# Altium PCB ECUCheater_New.PcbDoc
Units mm, origin at the board's own origin, x right, y up, seen from the top; angles counter-clockwise.
Board outline 51.5 x 32 mm, 2 copper layers (Top Layer, Bottom Layer); 60 components, 42 nets, 205 pads, 68 vias.
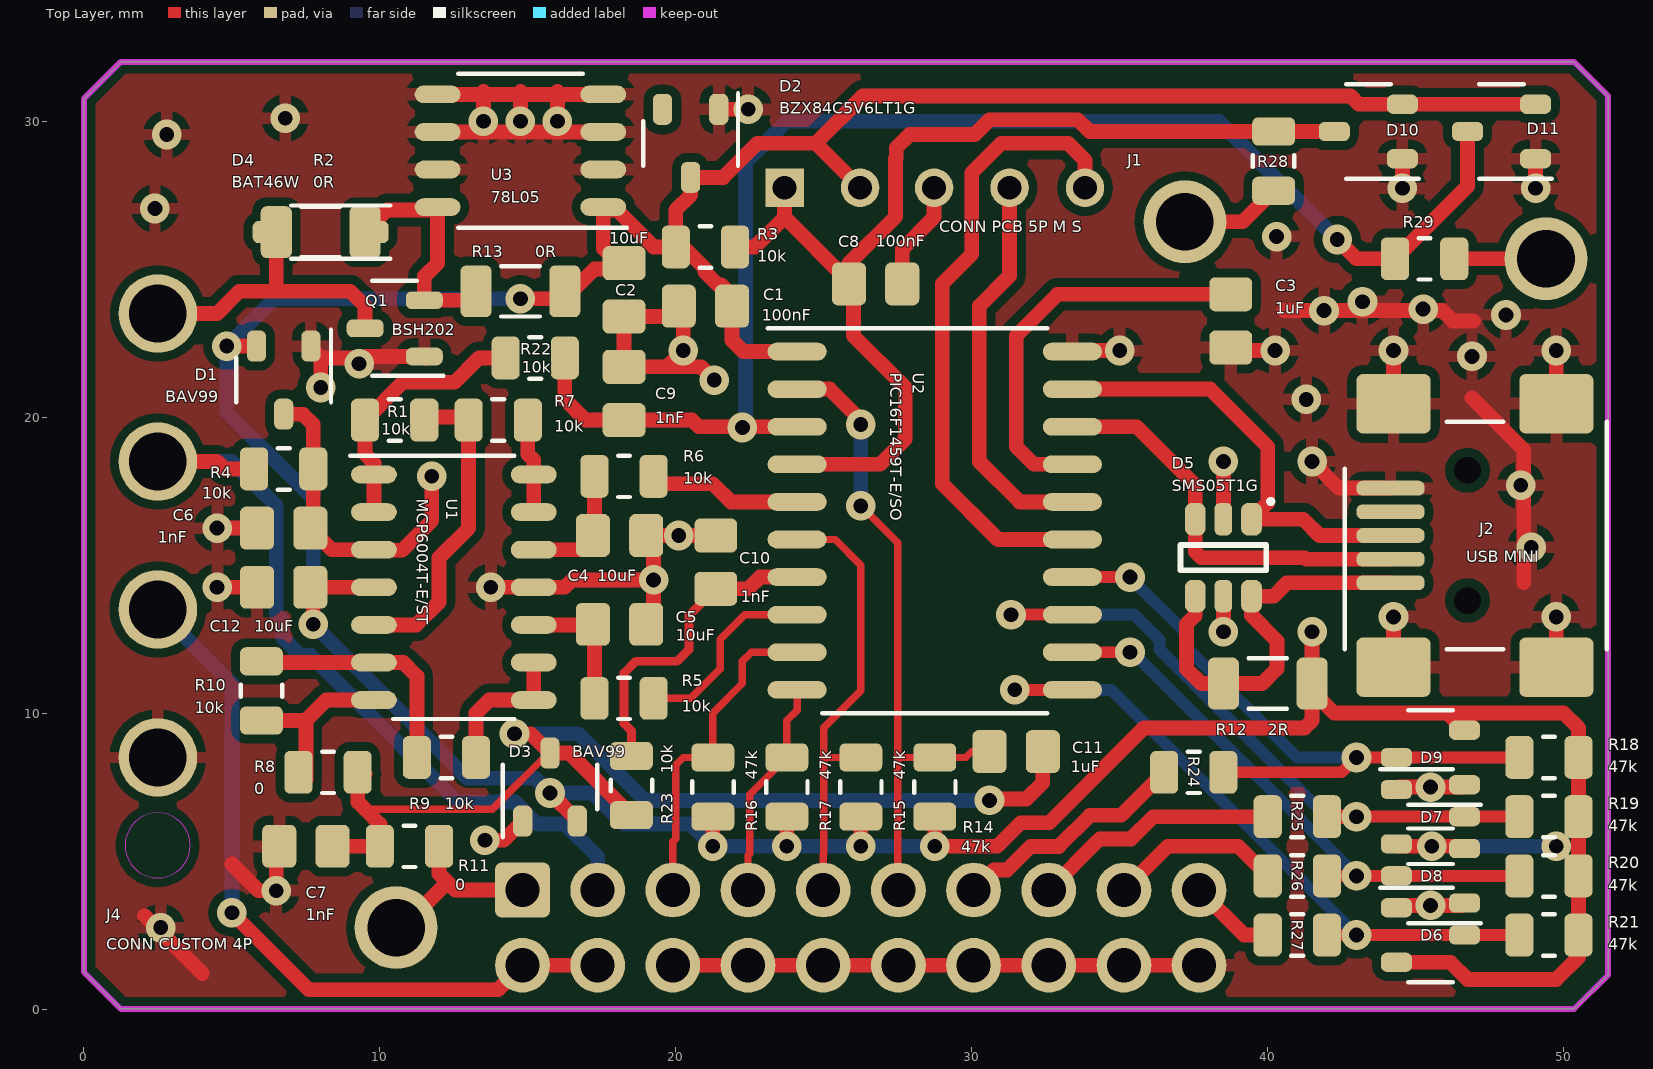
[diagram p0: Top Layer view]
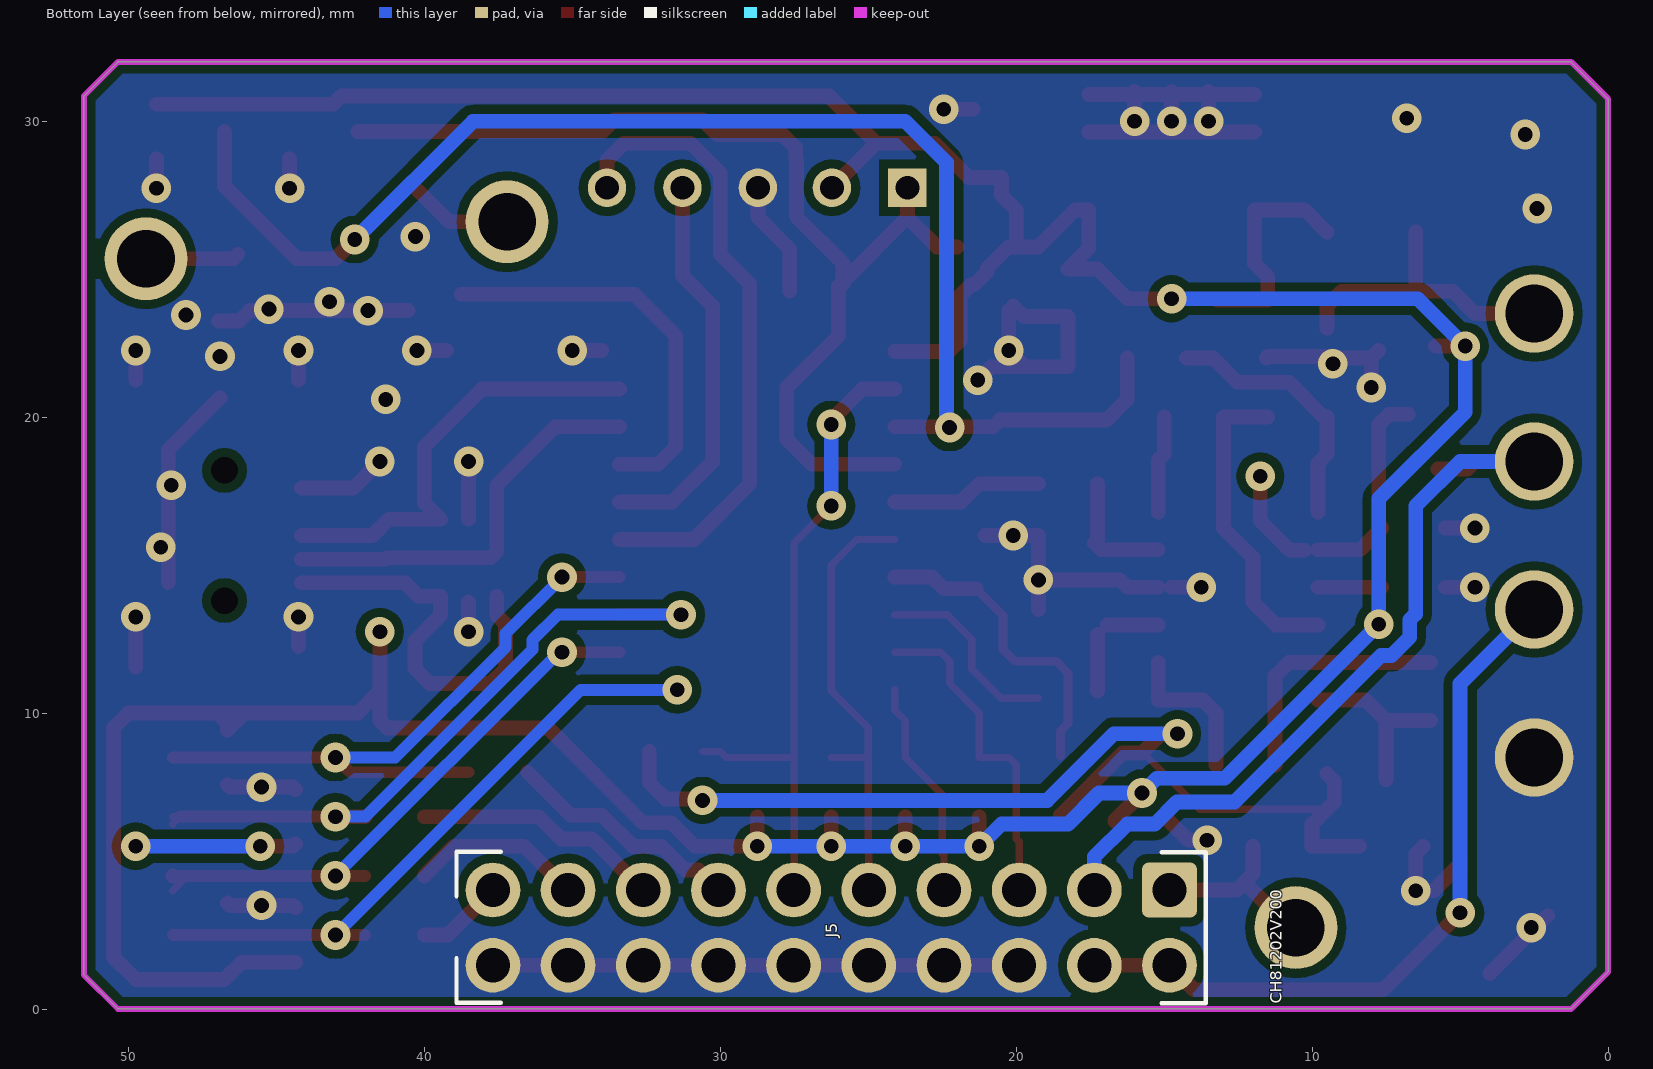
[diagram p1: Bottom Layer view, seen from below]
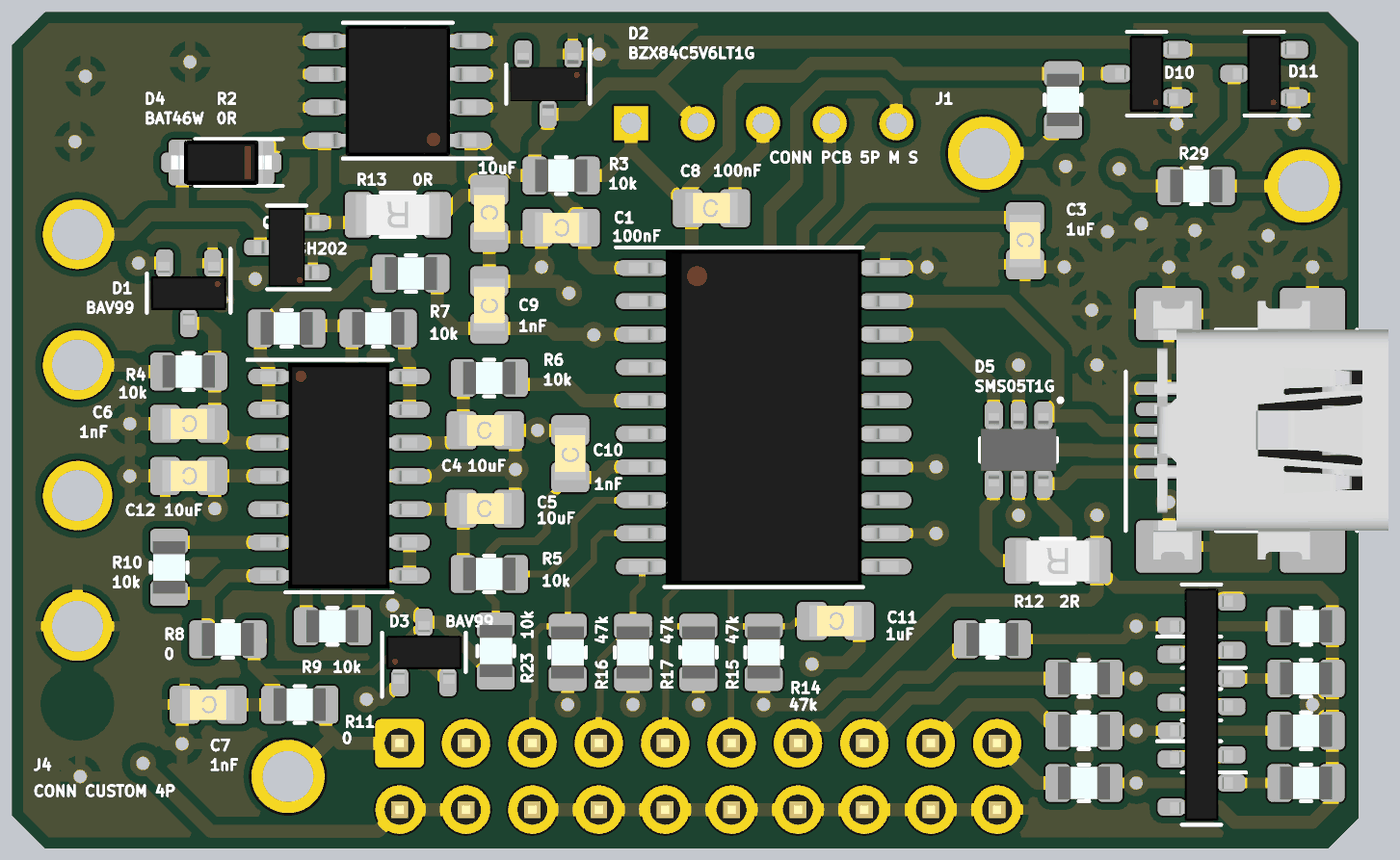
[diagram p2: 3D render of the assembled board from above, using the file's embedded part models]

## Layer stack, top to bottom
Top Solder: solder mask 0.0102, Solder Resist, Dk 3.5
Top Layer: signal copper 0.0356
Dielectric 1: dielectric 0.32, FR-4, Dk 4.8
Bottom Layer: signal copper 0.0356
Bottom Solder: solder mask 0.0102, Solder Resist, Dk 3.5

## Board outline
0,1.252 0,30.752 1.25,32.002 50.35,32.002 51.5,30.852 51.5,1.152 50.35,0.002 1.25,0.002

## Design rules (kind name [scope] priority, off if disabled: settings)
Clearance [All] p1: gap=0.3
ComponentClearance [All] p1 off: gap=0.254 collisioncheckmode=3 verticalgap=0.254 showdistances=FALSE
PolygonConnect PolygonConnect_1 [All vs OnLayer('Bottom Layer')] p1: connectstyle=Direct reliefconductorwidth=0.254 reliefentries=4 polygonreliefangle="90 Angle" airgapwidth=0.254
PolygonConnect [All] p2: connectstyle=Relief reliefconductorwidth=0.4 reliefentries=4 polygonreliefangle="90 Angle" airgapwidth=0.3
RoutingVias [All] p1: holewidth=0.711 width=1.27 viastyle="Through Hole" minholewidth=0.711 minwidth=1.27 maxholewidth=0.711 maxwidth=1.27
SolderMaskExpansion [All] p1: expansion=0.102
UnpouredPolygon [All] p1: allowunpoured=FALSE
Width [All] p1: maxlimit=5 minlimit=0.2 preferedwidth=0.25
28 further rules are at their usual default settings.

## Components (designator, comment, footprint, x,y, rotation, side; value= is the part's Value field where it differs from the comment)
C1 "100nF" SMD_0805_CAPC2012X145N 21,23.75 r180 top
C2 "10uF" SMD_0805_CAPC2012X145N 18.25,24.3 r270 top
C3 "1uF" SMD_0805_CAPC2012X145N 38.75,23.25 r270 top
C4 "10uF" SMD_0805_CAPC2012X145N 18.1,16 r0 top
C5 "10uF" SMD_0805_CAPC2012X145N 18.1,13 r0 top
C6 "1nF" SMD_0805_CAPC2012X145N 6.75,16.25 r180 top
C7 "1nF" SMD_0805_CAPC2012X145N 7.5,5.5 r180 top
C8 "100nF" SMD_0805_CAPC2012X145N 26.75,24.5 r0 top
C9 "1nF" SMD_0805_CAPC2012X145N 18.25,20.8 r90 top
C10 "1nF" SMD_0805_CAPC2012X145N 21.35,15.1 r90 top
C11 "1uF" SMD_0805_CAPC2012X145N 31.5,8.7 r180 top
C12 "10uF" SMD_0805_CAPC2012X145N 6.75,14.25 r180 top
D1 "BAV99" SMD_SOT23_SOT92P240X110-3N 6.75,21.25 r270 top
D2 "BZX84C5V6LT1G" SMD_SOT23_SOT95P240X112-3N 20.5,29.25 r270 top
D3 "BAV99" SMD_SOT23_SOT92P240X110-3N 15.75,7.5 r90 top
D4 "BAT46W" SMD_R_SOD123_SOD3715X145N 8,26.25 r180 top
D5 "SMS05T1G" SMD_SOT95P280X145-6N-W 38.5,15.25 r270 top
D6 "BAV99" SMD_SOT23_SOT92P240X110-3N 45.5,2.5 r0 top
D7 "BAV99" SMD_SOT23_SOT92P240X110-3N 45.5,6.5 r0 top
D8 "BAV99" SMD_SOT23_SOT92P240X110-3N 45.5,4.5 r180 top
D9 "BAV99" SMD_SOT23_SOT92P240X110-3N 45.5,8.5 r180 top
D10 "BAV99" SMD_SOT23_SOT92P240X110-3N 43.4,29.65 r180 top
D11 "BAV99" SMD_SOT23_SOT92P240X110-3N 47.9,29.65 r180 top
J1 "CONN PCB 5P M S" "SIP5 - PGM" 28.75,27.75 r0 top
J2 "USB MINI" SMD_CON-CVILUX-CU04-SCM15B0 46.75,16 r90 top
J4 "CONN CUSTOM 4P" PTH_CON_CUSTOM_10 2.5,16 r270 top
J5 "CH81202V200" PTH_HDRV40W6240P254_2X10_M 26.25,2.75 r0 bottom locked
Q1 "BSH202" SMD_SOT23_SOT95P230X110-3N 10.5,23 r180 top
R1 "10k" SMD_0805_RESC2012X130N 10.5,19.9 r180 top
R2 "0R" SMD_1206_RESC3216X65N 8,26.25 r180 top
R3 "10k" SMD_0805_RESC2012X130N 21,25.75 r180 top
R4 "10k" SMD_0805_RESC2012X130N 6.75,18.25 r180 top
R5 "10k" SMD_0805_RESC2012X130N 18.25,10.5 r0 top
R6 "10k" SMD_0805_RESC2012X130N 18.25,18 r0 top
R7 "10k" SMD_0805_RESC2012X130N 14,19.9 r0 top
R8 "0" SMD_0805_RESC2012X130N 8.25,8 r180 top
R9 "10k" SMD_0805_RESC2012X130N 12.25,8.5 r0 top
R10 "10k" SMD_0805_RESC2012X130N 6,10.75 r90 top
R11 "0" SMD_0805_RESC2012X130N 11,5.5 r180 top
R12 "2R" SMD_1206_RESC3216X65N 40,11 r180 top
R13 "0R" SMD_1206_RESC3216X65N 14.75,24.25 r180 top
R14 "47k" SMD_0805_RESC2012X130N 28.75,7.5 r270 top
R15 "47k" SMD_0805_RESC2012X130N 26.25,7.5 r270 top
R16 "47k" SMD_0805_RESC2012X130N 21.25,7.5 r270 top
R17 "47k" SMD_0805_RESC2012X130N 23.75,7.5 r270 top
R18 "47k" SMD_0805_RESC2012X130N 49.5,8.5 r0 top
R19 "47k" SMD_0805_RESC2012X130N 49.5,6.5 r0 top
R20 "47k" SMD_0805_RESC2012X130N 49.5,4.5 r0 top
R21 "47k" SMD_0805_RESC2012X130N 49.5,2.5 r0 top
R22 "10k" SMD_0805_RESC2012X130N 15.25,22 r180 top
R23 "10k" SMD_0805_RESC2012X130N 18.5,7.55 r270 top
R24 "0k" SMD_0805_RESC2012X130N 37.5,8 r0 top
R25 "0k" SMD_0805_RESC2012X130N 41,6.5 r0 top
R26 "0k" SMD_0805_RESC2012X130N 41,4.5 r0 top
R27 "0k" SMD_0805_RESC2012X130N 41,2.5 r0 top
R28 "10k" SMD_0805_RESC2012X130N 40.2,28.65 r270 top
R29 "10k" SMD_0805_RESC2012X130N 45.3,25.35 r0 top
U1 "MCP6004T-E/ST" SMD_SOIC127P600X175-14N 12.5,14.25 r0 top
U2 "PIC16F1459T-E/SO" SMD_SOIC127P1030X265-20N 28.75,16.5 r0 top
U3 "78L05" SMD_SOIC127P602X173-8N 14.75,29 r180 top

## Footprints (in the part's own frame and the unit in brackets; to place one, negate y for a bottom-side part, rotate by r counter-clockwise, add the part's x,y. Pads: shape width x height; smd on the part's side, far side on the other; paste and mask are expansions set on the pad)
PTH_CON_CUSTOM_10 [mm]
  round 2.65 hole 1.95 mask+0.075: 1(-7.5,0) 2(-2.5,0) 3(2.5,0) 4(7.5,0)
  Top Layer keep-out region: 11.57,-0.01 11.486,0.411 11.248,0.768 10.891,1.006 10.47,1.09 10.47,1.09 10.049,1.006 9.692,0.768 9.454,0.411 9.37,-0.01 9.37,-0.01 9.454,-0.431 9.692,-0.788 10.049,-1.026 10.47,-1.11 10.47,-1.11 10.891,-1.026 11.248,-0.788 11.486,-0.431 11.57,-0.01
PTH_HDRV40W6240P254_2X10_M [mm]
  rrect22% 1.85x1.85 / inner round 1.85 / far side rrect22% 1.85x1.85 hole 1.15 mask+0.075: 1(-11.43,-1.27)
  round 1.85 hole 1.15 mask+0.075: 2(-11.43,1.27) 3(-8.89,-1.27) 4(-8.89,1.27) 5(-6.35,-1.27) 6(-6.35,1.27) 7(-3.81,-1.27) 8(-3.81,1.27) 9(-1.27,-1.27) 10(-1.27,1.27) 11(1.27,-1.27) 12(1.27,1.27) 13(3.81,-1.27) 14(3.81,1.27) 15(6.35,-1.27) 16(6.35,1.27) 17(8.89,-1.27) 18(8.89,1.27) 19(11.43,-1.27) 20(11.43,1.27)
  silkscreen extent -12.66,-2.56 12.66,2.55, body extent -12.7,-2.54 12.7,2.54, height 8.5
"SIP5 - PGM" [mm]
  rect 1.3x1.3 hole 0.8: 1(-5.075,0)
  round 1.3 hole 0.8: 2(-2.525,0) 3(-0.025,0) 4(2.525,0) 5(5.075,0)
SMD_0805_CAPC2012X145N [mm]
  rrect35% 1.15x1.45 smd mask+0.075: 1(-0.9,0) 2(0.9,0)
  body extent -1,-0.6 1,0.6, height 1.45
SMD_0805_RESC2012X130N [mm]
  rrect42% 0.95x1.45 smd mask+0.075: 1(-1,0) 2(1,0)
  silkscreen extent -0.2,-0.7 0.2,0.7, body extent -1,-0.62 1,0.63, height 1.3
SMD_1206_RESC3216X65N [mm]
  rrect38% 1.05x1.75 smd mask+0.075: 1(-1.5,0) 2(1.5,0)
  silkscreen extent -0.65,-0.85 0.65,0.85, body extent -1.6,-0.8 1.6,0.8, height 0.65
SMD_CON-CVILUX-CU04-SCM15B0 [mm]
  rrect80% 0.5x2.3 smd mask+0.075: 1(-1.6,2.6) 2(-0.8,2.6) 3(0,2.6) 4(0.8,2.6) 5(1.6,2.6)
  rrect20% 2x2.5 smd mask+0.075: 6(4.45,2.5) 7(4.45,-3) 8(-4.45,-3) 9(-4.45,2.5)
  round 0.5 hole 0.9 unplated mask+0.275: 10(-2.2,0) 11(2.2,0)
  silkscreen extent -3.85,-4.7 3.85,4.15, body extent -4.95,-5.9 4.95,3.1, height 3.95
SMD_R_SOD123_SOD3715X145N [mm]
  rrect53% 1x0.75 smd mask+0.075: 1(-1.8,0) 2(1.8,0)
  silkscreen extent -2.35,-0.9 1,0.9, body extent -1.92,-0.85 1.93,0.85, height 1.45
SMD_SOIC127P600X175-14N [mm]
  oval 1.55x0.6 smd mask+0.075: 1(-2.7,3.81) 2(-2.7,2.54) 3(-2.7,1.27) 4(-2.7,0) 5(-2.7,-1.27) 6(-2.7,-2.54) 7(-2.7,-3.81) 8(2.7,-3.81) 9(2.7,-2.54) 10(2.7,-1.27) 11(2.7,0) 12(2.7,1.27) 13(2.7,2.54) 14(2.7,3.81)
  silkscreen extent -3.5,-4.45 2.05,4.45, body extent -3,-4.32 3,4.33, height 1.75
SMD_SOIC127P602X173-8N [mm]
  oval 1.55x0.6 smd mask+0.075: 1(-2.8,1.905) 2(-2.8,0.635) 3(-2.8,-0.635) 4(-2.8,-1.905) 5(2.8,-1.905) 6(2.8,-0.635) 7(2.8,0.635) 8(2.8,1.905)
  silkscreen extent -3.6,-2.6 2.1,2.6, body extent -3.01,-2.5 3.01,2.5, height 1.73
SMD_SOIC127P1030X265-20N [mm]
  oval 2x0.6 smd mask+0.075: 1(-4.65,5.715) 2(-4.65,4.445) 3(-4.65,3.175) 4(-4.65,1.905) 5(-4.65,0.635) 6(-4.65,-0.635) 7(-4.65,-1.905) 8(-4.65,-3.175) 9(-4.65,-4.445) 10(-4.65,-5.715) 11(4.65,-5.715) 12(4.65,-4.445) 13(4.65,-3.175) 14(4.65,-1.905) 15(4.65,-0.635) 16(4.65,0.635) 17(4.65,1.905) 18(4.65,3.175) 19(4.65,4.445) 20(4.65,5.715)
  silkscreen extent -5.65,-6.5 3.8,6.5, body extent -5.16,-6.4 5.16,6.4, height 2.65
SMD_SOT23_SOT92P240X110-3N [mm]
  rrect62% 1.05x0.65 smd mask+0.075: 1(-1.15,0.92) 2(-1.15,-0.92) 3(1.15,0)
  silkscreen extent -1.7,-1.6 0.75,1.6, body extent -1.2,-1.45 1.2,1.45, height 1.2
SMD_SOT23_SOT95P230X110-3N [mm]
  rrect67% 1.25x0.6 smd mask+0.075: 1(-1,0.95) 2(-1,-0.95) 3(1,0)
  silkscreen extent -1.65,-1.6 0.75,1.6, body extent -1.25,-1.5 1.25,1.5, height 1.1
SMD_SOT23_SOT95P240X112-3N [mm]
  rrect62% 1.05x0.65 smd mask+0.075: 1(-1.15,0.95) 2(-1.15,-0.95) 3(1.15,0)
  silkscreen extent -1.7,-1.6 0.75,1.6, body extent -1.2,-1.45 1.2,1.45, height 1.2
SMD_SOT95P280X145-6N-W [mm]
  rrect67% 1.1x0.7 smd mask+0.075: 1(-1.3,0.95) 3(-1.3,-0.95) 4(1.3,-0.95) 6(1.3,0.95)
  rrect67% 1.1x0.6 smd mask+0.075: 2(-1.3,0) 5(1.3,0)
  silkscreen extent -2.05,-1.45 0.43,1.75, body extent -1.4,-1.45 1.4,1.45, height 1.45

## Part data
C1 C2 C8: library part CAP000022730
C3: library part CAP000043344
C4 C5 C12: library part CAP000043646
C6 C7 C9 C10 C11: library part CAP000025544
D1 D3 D6 D7 D8 D9 D10 D11: library part DDE000002707
D2: library part DDE000002715
D4: library part DDE000000481
D5: library part DDE000002846
J1: library part CON000000006
J2: library part CON000000048
J4: library part CON000000197
J5: library part CON000000290
Q1: library part TRA000000687
R1 R3 R4 R5 R6 R7 R9 R10 R11 R22 R23 R28 R29: library part RES000008663
R2 R12 R13: library part RES000007051
R8: library part RES000006422
R14 R15 R16 R17 R18 R19 R20 R21 R24 R25 R26 R27: library part RES000006462
U1: library part ANA000000050
U2: library part MCU000000108
U3: library part IC_LM2931AD-5.0R2G_SO-8

## Free pads (board coordinates)
  round 2.8 hole 1.95: 1(10.55,2.75) 1(37.2,26.6) 1(49.4,25.35)

## Via types
v1: diameter 1, hole 0.5, Top Layer to Bottom Layer, tented both sides, 68 vias

## Nets (pads, with @x,y where several pads share a name; then routed paths per layer and width w, separated by ;. In a path a pad name is that pad's centre, name@x,y a point inside that pad or via, vN(x,y) a via of type N, cw(c..) or ccw(c..) an arc to the next point about the centre after c; other vN are vias at no path point)
5.0V: C1.1 C2.1 C12.1 D1.2 D2.3 D3.2 D6.2 D7.2 D8.2 D9.2 D10.2 D11.2 J1.2 R3.2 R12.1 R13.1 R14.2 R15.2 R16.2 R17.2 R18.2 R19.2 R20.2 R21.2 U1.4 U2.1 U3.1 | length 155
  Top Layer w0.5: v1(4.83,22.4) D1.2 ; C12.1 U1.4 ; v1(7.75,13) C12.1@7.75,14 ; v1(14.75,24) 16.25,24 17.25,25 18.25,25 17.55,25.7 17.55,27 18,27 19.25,25.75 R3.2 ; v1(15.75,7.3) 16.67,6.38 D3.2 ; v1(21.25,5.5) R16.2 ; v1(23.75,5.5) R17.2 ; U2.1 22.285,22.215 21.9,22.6 C1.1 21.9,24.1 21.525,24.475 21.414,24.475 20.975,24.914 20.975,25.025 20.25,25.75 R3.2 ; J1.2 24.725,29.25 ; v1(26.25,5.5) R15.2 ; R14.2 v1(28.75,5.5) 30.863,5.5 31.658,6.295 32.612,6.295 35.817,9.5 41.25,9.5 41.5,9.75 R12.1@41.5,11.25 ; v1(41.5,12.75) 41.5,10.75 42.25,10 46.07,10 ; D6.2 46.17,1.58 46.75,1 49.75,1 50.5,1.75 R21.2 R20.2 R19.2 R18.2 50.5,9.5 50,10 47,10 ; D7.2 44.43,5.5 v1(45.54,5.5) D8.2@46.65,5.5 ; D11.2 D10.2 43.08,30.57 42.8,30.85 26.325,30.85 24.725,29.25 ; R3.2 20,27 20.5,27.5 D2.3 21.6,28.1 22.75,29.25 24.725,29.25 ; 46.07,10 47,10 ; 46.07,10 D9.2 46.65,9.65 47,10
  Bottom Layer w0.5: v1(14.75,24) 6.43,24 v1(4.83,22.4) 4.83,20.17 7.75,17.25 v1(7.75,13) 12.95,7.8 15.25,7.8 v1(15.75,7.3) 17.2,7.3 18.25,6.25 20.5,6.25 v1(21.25,5.5) v1(23.75,5.5) v1(26.25,5.5) v1(28.75,5.5) ; v1(45.54,5.5) v1(49.75,5.5)
"5.0V PROT": D4.1 Q1.2 R2.1 R13.2 U3.8 | length 7.8
  Top Layer w0.5: R2.1 10.25,27 11.95,27 11.95,25.2 11.5,24.75 Q1.2 13.2,23.95 R13.2@13.25,24
5.0V_IN: D4.2 J4.1 Q1.3 R2.2 | length 10.3
  Top Layer w0.5: J4.1 4.5,23.5 5.25,24.25 9,24.25 9.5,23.75 Q1.3 ; 6.5,24.25 R2.2
AN3: C9.1 D11.3 R22.1 R29.1 U2.3 | length 48.4
  Top Layer w0.5: R22.1 16.25,20.6 16.95,19.9 C9.1 20.55,19.9 20.775,19.675 U2.3 ; v1(42.35,26) 43,25.35 R29.1 46.75,27.8 D11.3
  Bottom Layer w0.5: v1(22.25,19.65) 22.35,19.75 22.35,28.6 23.75,30 38.35,30 v1(42.35,26)
AN7: C10.1 R23.1 U2.7 | length 10.8
  Top Layer w0.3: R23.1 18.5,9.4 18.25,9.65 18.25,11.35 18.65,11.75 20.05,11.75 20.45,12.15 20.45,13.3 C10.1
  Top Layer w0.5: C10.1 22.45,14.2 22.845,14.595 U2.7
D+: D5.1 J2.3 U2.19 | length 15
  Top Layer w0.5: U2.19 38.055,20.945 40,19 40,17.1 D5.1 41.2,16.55 41.75,16 J2.3
D-: D5.3 J2.2 U2.18 | length 13.9
  Top Layer w0.5: U2.18 35.575,19.675 37.55,17.7 D5.3 37.55,15.45 37.75,15.25 41.25,15.25 41.3,15.2 J2.2
GND: C1.2 C2.2 C3.2 C4.2 C5.2 C6.2 C7.2 C8.2 C9.2 C10.2 C12.2 D1.1 D2.1 D3.1 D5.2 D5.5 D6.1 D7.1 D8.1 D9.1 D10.1 D11.1 J1.3 J2.5 J2.6 J2.7 J2.8 J2.9 J4.4 J5.6 J5.8 J5.10 J5.12 J5.14 J5.16 J5.18 J5.20 Q1.1 U1.11 U2.20 U3.2 U3.3 U3.4 U3.5 U3.6 U3.7 | length 103.5
  Top Layer w0.5: 2.05,3.15 4,1.2 ; v1(4.5,14.25) C12.2@5.5,14.25 ; v1(4.5,16.25) C6.2@5.5,16.25 ; 5,4.9 5.9,4 v1(6.5,4) 6.5,5.25 C7.2@6.25,5.5 ; D1.1@7.75,22.25 8,22 ; v1(8,21) 8,22 ; Q1.1@11.55,22 Q1.1 9.55,22.05 v1(9.3,21.8) 9.1,22 8,22 ; U3.6 U3.3 ; U3.5 13.5,30.905 ; v1(13.5,30) 13.5,30.905 ; 13.5,31 13.5,30.905 ; v1(13.55,5.7) 14.18,5.7 D3.1 ; v1(13.75,14.25) U1.11@14.75,14.25 ; v1(14.75,30) 14.75,30.905 ; 14.75,31 14.75,30.905 ; U1.11 16.25,14.25 16.5,14.5 v1(19.25,14.5) ; v1(16,30) 16,30.905 ; 16,31 16,30.905 ; U3.4 16,30.905 ; C5.2@19.25,13.5 v1(19.25,14.5) ; J5.6 J5.8 J5.10 J5.12 J5.14 J5.16 J5.18 J5.20 ; C10.2@21.05,16 19.25,16 v1(19.25,14.5) ; v1(21.3,21.25) 20.85,21.7 19.7,21.7 ; D2.1 v1(22.45,30.4) ; C8.2@27.65,24.25 27.65,25.675 28.725,26.75 J1.3 ; U2.20@34,22.25 v1(35,22.25) ; v1(38.5,12.75) D5.5@38.5,13.75 ; D5.2 v1(38.5,18.5) ; C3.2@39.25,22.25 v1(40.25,22.25) ; 40.55,23.6 45.9,23.6 46.25,23.25 46.95,23.25 ; v1(41.5,18.5) 42.4,17.6 J2.5 ; J2.9@44.25,12.25 v1(44.25,13.25) ; J2.6@44.25,21.25 v1(44.25,22.25) ; D6.1 44.43,3.5 46.57,3.5 D8.1 ; D7.1 44.43,7.5 46.57,7.5 D9.1 ; v1(44.55,27.73) D10.1 ; 46.9,20.65 48.65,18.9 48.65,14.4 ; v1(49.05,27.73) D11.1 ; J2.8 v1(49.75,13.25) ; J2.7@49.75,21.25 v1(49.75,22.25) ; 13.5,30.905 14.75,30.905 ; 14.75,30.905 16,30.905 ; 19.7,21.7 v1(20.25,22.25) 20.25,23.6 C1.2 19.75,23.4 C2.2 C9.2 19.7,21.7
  other v1: 2.6,2.75 45.5,3.5 45.5,7.5 48.9,15.6 20.1,16 48.55,17.7 41.3,20.6 46.9,22.05 48.05,23.45 41.9,23.6 45.25,23.65 43.2,23.9 40.3,26.1 2.4,27.05 2.8,29.55 6.8,30.1
ICSPCLK: J1.5 U2.15 | length 21.5
  Top Layer w0.5: U2.15 30.885,15.865 29,17.75 29,24.5 30,25.5 30,28.25 31,29.25 33.25,29.25 33.825,28.675 J1.5
ICSPDAT: J1.4 U2.16 | length 13.4
  Top Layer w0.5: J1.4 31.275,24.775 30.25,23.75 30.25,18.5 31.615,17.135 U2.16
MCLR: C8.1 D10.3 J1.1 R3.1 R28.1 U2.4 | length 36.9
  Top Layer w0.5: R3.1 22.675,25.75 23.675,26.75 ; J1.1 23.675,26.75 ; U2.4 26.905,18.405 27.75,19.25 27.75,21 26,22.75 26,24.425 C8.1@25.85,24.575 ; C8.1 C8.1@25.85,24.575 ; D10.3 33.981,29.65 33.581,30.05 30.6,30.05 30.1,29.55 27.9,29.55 27.45,29.1 27.45,28.75 27.425,28.725 27.425,26.775 25.85,25.2 C8.1@25.85,24.575 ; 23.675,26.75 C8.1@25.85,24.575
NetC3_1: C3.1 U2.17 | length 13.7
  Top Layer w0.5: U2.17 32.095,18.405 31.5,19 31.5,22.75 32.9,24.15 C3.1
NetC4_1: C4.1 R6.1 U1.12 | length 4.3
  Top Layer w0.5: U1.12 17.12,15.52 17.35,15.75 17.25,15.85 R6.1@17.25,17.75
NetC5_1: C5.1 R5.1 U1.10 | length 4.1
  Top Layer w0.25: C5.1@16.92,12.98 C5.1@17.25,12.65
  Top Layer w0.5: U1.10 C5.1@16.92,12.98 ; R5.1@17.25,10.75 C5.1@17.25,12.65
NetC6_1: C6.1 D1.3 R4.1 U1.3 | length 10.6
  Top Layer w0.25: C6.1 C6.1@7.75,16.35
  Top Layer w0.5: D1.3 7.4,20.1 7.75,19.75 R4.1 C6.1@7.75,16.35 ; C6.1 8.38,15.52 U1.3 ; U1.3@10.25,15.5 10.75,15.5 11.75,16.5 v1(11.75,18)
NetC7_1: C7.1 C11.1 D3.3 R8.1 R11.2 R23.2 | length 36.7
  Top Layer w0.25: 9.5,6.75 13.8,6.75 D3.3@15.75,8.7
  Top Layer w0.5: C7.1 R11.2 10,6.25 9.5,6.75 9.25,7 9.25,7.7 R8.1@9.5,7.95 ; v1(14.55,9.3) 15.1,9.3 15.725,8.675 D3.3 16.4,8.65 R23.2 ; v1(30.6,7.05) 30.645,7.095 31.845,7.095 32.4,7.65 C11.1
  Bottom Layer w0.5: v1(14.55,9.3) 16.7,9.3 18.95,7.05 v1(30.6,7.05)
NetR1_1: R1.1 R7.1 U1.5 | length 10.7
  Top Layer w0.5: U1.5 11.23,12.98 12,13.75 12,15.25 13,16.25 13,20 R1.1@11.5,20
NetR1_2: R1.2 R22.2 U1.1 U1.2 | length 9
  Top Layer w0.5: R1.2@9.5,20 R1.2 ; U1.2 U1.1 9.8,18.45 9.5,18.75 R1.2 ; R22.2 13.35,22 12.525,21.175 10.775,21.175 R1.2
NetR7_2: R7.2 U1.13 U1.14 | length 3.3
  Top Layer w0.5: R7.2@15,20 15,18.75 15.2,18.55 U1.14 U1.13
NetR8_2: R8.2 R10.1 U1.7 | length 6.1
  Top Layer w0.5: R10.1 7.5,9.75 ; R8.2@7.5,7.75 7.5,9.75 ; U1.7 8.19,10.44 7.5,9.75
NetR9_1: R9.1 R10.2 U1.6 | length 8.4
  Top Layer w0.5: R10.2@6,11.71 U1.6 10.79,11.71 11.25,11.25 R9.1@11.25,8.25
NetR9_2: R9.2 U1.8 U1.9 | length 5.2
  Top Layer w0.5: R9.2@13.25,8.25 13.25,10 13.69,10.44 U1.8 U1.9
OPAMP_OUT: J5.1 pad.1@10.55,2.75 R11.1 | length 6.3
  Top Layer w0.5: pad.1@10.55,2.75 10.75,2.75 12.285,4.285 ; R11.1 12,4.57 12.285,4.285 ; J5.1 12.55,4.02 12.285,4.285
PWM1: R6.2 U2.5 | length 5.1
  Top Layer w0.5: R6.2@19.25,17.75 21.25,17.75 21.865,17.135 U2.5
PWM2: R5.2 U2.8 | length 6.6
  Top Layer w0.25: R5.2 20.5,10.5 21.5,11.5 21.5,12.5 22.325,13.325 U2.8
PWM_IN: pad.1@37.2,26.6 R28.2 | length 3.4
  Top Layer w0.5: pad.1@37.2,26.6 39.15,26.6 R28.2
PWM_IN2: pad.1@49.4,25.35 R29.2 | length 3.2
  Top Layer w0.5: R29.2@46.3,25.5 46.45,25.35 pad.1@49.4,25.35
RA5: C11.2 J5.11 R14.1 U2.2 | length 22.2
  Top Layer w0.25: v1(26.25,17) 27.5,15.75 27.5,4.04 J5.11 ; 27.5,8.5 R14.1 29.8,8.5 30,8.7 C11.2
  Top Layer w0.5: U2.2 25.202,20.945 26.25,19.898 v1(26.25,19.75)
  Bottom Layer w0.5: v1(26.25,17) v1(26.25,19.75)
RB4: D7.3 R19.1 R25.2 U2.13 | length 23.6
  Top Layer w0.25: R19.1@48.5,6.25 48.25,6.5 R19.1
  Top Layer w0.4: v1(31.325,13.325) U2.13 ; v1(43,6.5) D7.3 R19.1@48.25,6.5
  Top Layer w0.5: R25.2 v1(43,6.5)
  Bottom Layer w0.4: v1(31.325,13.325) 35.489,13.325 36.345,12.469 36.345,12.145 41.99,6.5 v1(43,6.5)
RB4_O: J5.15 R25.1 | length 8.4
  Top Layer w0.5: J5.15 34.33,5.75 35.381,5.75 36.131,6.5 R25.1
RB5: D8.3 R20.1 R26.2 U2.12 | length 19.9
  Top Layer w0.25: 48,4.5 R20.1@48.5,4
  Top Layer w0.4: U2.12 v1(35.345,12.055) ; R26.2 v1(43,4.5) 48,4.5 R20.1
  Bottom Layer w0.4: v1@35.395,12.105 v1(43,4.5)
RB5_O: J5.17 R26.1 | length 5.9
  Top Layer w0.5: J5.17 36.62,5.5 39,5.5 R26.1
RB6_LED: D6.3 R21.1 R27.2 U2.11 | length 23.4
  Top Layer w0.4: v1(31.455,10.785) U2.11 ; R27.2 v1(43,2.5) D6.3 R21.1
  Bottom Layer w0.4: v1(31.455,10.785) 34.715,10.785 v1(43,2.5)
RB6_LED_O: J5.19 R27.1 | length 2.9
  Top Layer w0.5: J5.19 39.2,2.5 R27.1
RB7: J5.7 R17.1 U2.10 | length 7.5
  Top Layer w0.25: J5.7 22.44,5.19 22.5,5.25 22.5,7.25 R17.1 23.75,9.75 24.1,10.1 U2.10
RC2: D9.3 R18.1 R24.2 U2.14 | length 22.6
  Top Layer w0.4: U2.14 v1(35.345,14.595) ; R24.2 42.5,8 v1(43,8.5) D9.3 R18.1
  Bottom Layer w0.4: v1(35.345,14.595) 37.25,12.69 37.25,12.23 40.98,8.5 v1(43,8.5)
RC2_O: J5.13 R24.1 | length 8.1
  Top Layer w0.5: J5.13 30.74,4.7 31.194,4.7 31.989,5.495 32.944,5.495 33.999,6.55 35.05,6.55 R24.1
RC4: J5.9 R15.1 U2.6 | length 15.3
  Top Layer w0.25: U2.6 25.385,15.865 26.25,15 26.25,10.75 25,9.5 25,8.5 ; J5.9 24.98,5.23 25,5.25 25,8.5 ; R15.1 25,8.5
RC7: J5.5 R16.1 U2.9 | length 11.3
  Top Layer w0.25: J5.5 19.9,5.65 19.995,5.745 19.995,8.245 20.25,8.5 R16.1 21.25,10 22.25,11 22.25,11.75 22.555,12.055 U2.9
SENSOR_IN: J4.2 J5.3 R4.2 | length 27.3
  Top Layer w0.5: J4.2 4.5,18.5 4.75,18.25 R4.2
  Bottom Layer w0.5: J4.2 5,18.5 6.5,17 6.5,13.35 6.7,13.15 6.7,12.565 7.315,11.95 7.669,11.95 12.619,7 14.565,7 15.315,6.25 16.25,6.25 17.36,5.14 J5.3
SENSOR_OUT: J4.3 J5.2 J5.4 | length 25.1
  Top Layer w0.5: v1(5,3.25) 7.598,0.652 13.992,0.652 J5.2 J5.4
  Bottom Layer w0.5: J4.3 5,11 v1(5,3.25)
USB5.0V: D5.4 D5.6 J2.1 R12.2 | length 13.7
  Top Layer w0.5: D5.4 37.55,13.3 37.25,13 37.25,11.5 37.75,11 R12.2 39.811,11 40.311,11.5 40.311,12.439 39.45,13.3 D5.6 40.2,13.95 40.65,14.4 J2.1
pads on no net: D2.2 J2.4 J2.10 J2.11

## Polygon pours and split planes (outlines as drawn)
GND on Top Layer "GNDTop" (solid, remove dead copper, pour order 2): 0,30.752 1.25,32.002 50.35,32.002 51.5,30.852 51.5,1.152 50.35,0.002 1.25,0.002 0,1.252
GND on Bottom Layer "GNDBottom" (solid, remove dead copper, pour order 4): 0,30.752 1.248,32 1.25,32.002 50.35,32.002 51.5,30.852 51.5,1.25 51.5,1.152 50.35,0.002 1.25,0.002 0,1.252

## Keep-outs
Keep-Out Layer:
  the board outline again, w0.2

## Text inside footprints (layer, text, board x,y; h text height)
J2: Mechanical 3 "5" at 46.15,17.483 h0.4 r90; Mechanical 3 "1" at 46.15,14.34 h0.4 r90
J4: Mechanical 3 "4" at 0.9,6.929 h0.4 r270; Mechanical 3 "1" at 0.9,25.31 h0.4 r270
J5: Mechanical 3 "2" at 13.763,0.82 h0.4 r180; Mechanical 3 "1" at 15.855,5.04 h0.4 r180; Mechanical 3 "20" at 36.24,0.79 h0.4 r180; Mechanical 3 "19" at 36.24,5 h0.4 r180